# Altium PCB SensorCentral.PcbDoc (part 2 of 3)
Units mm, origin at the board's own origin, x right, y up, seen from the top; angles counter-clockwise.
Board outline 99.21 x 99.07 mm, 6 copper layers (Top Layer 1, GND1, Signal, GND2, GND3, Bottom Layer 1), stack 1.538 mm thick; 91 components, 67 nets, 452 pads, 462 vias.
Unrouted connection lines stored in the file: 278.
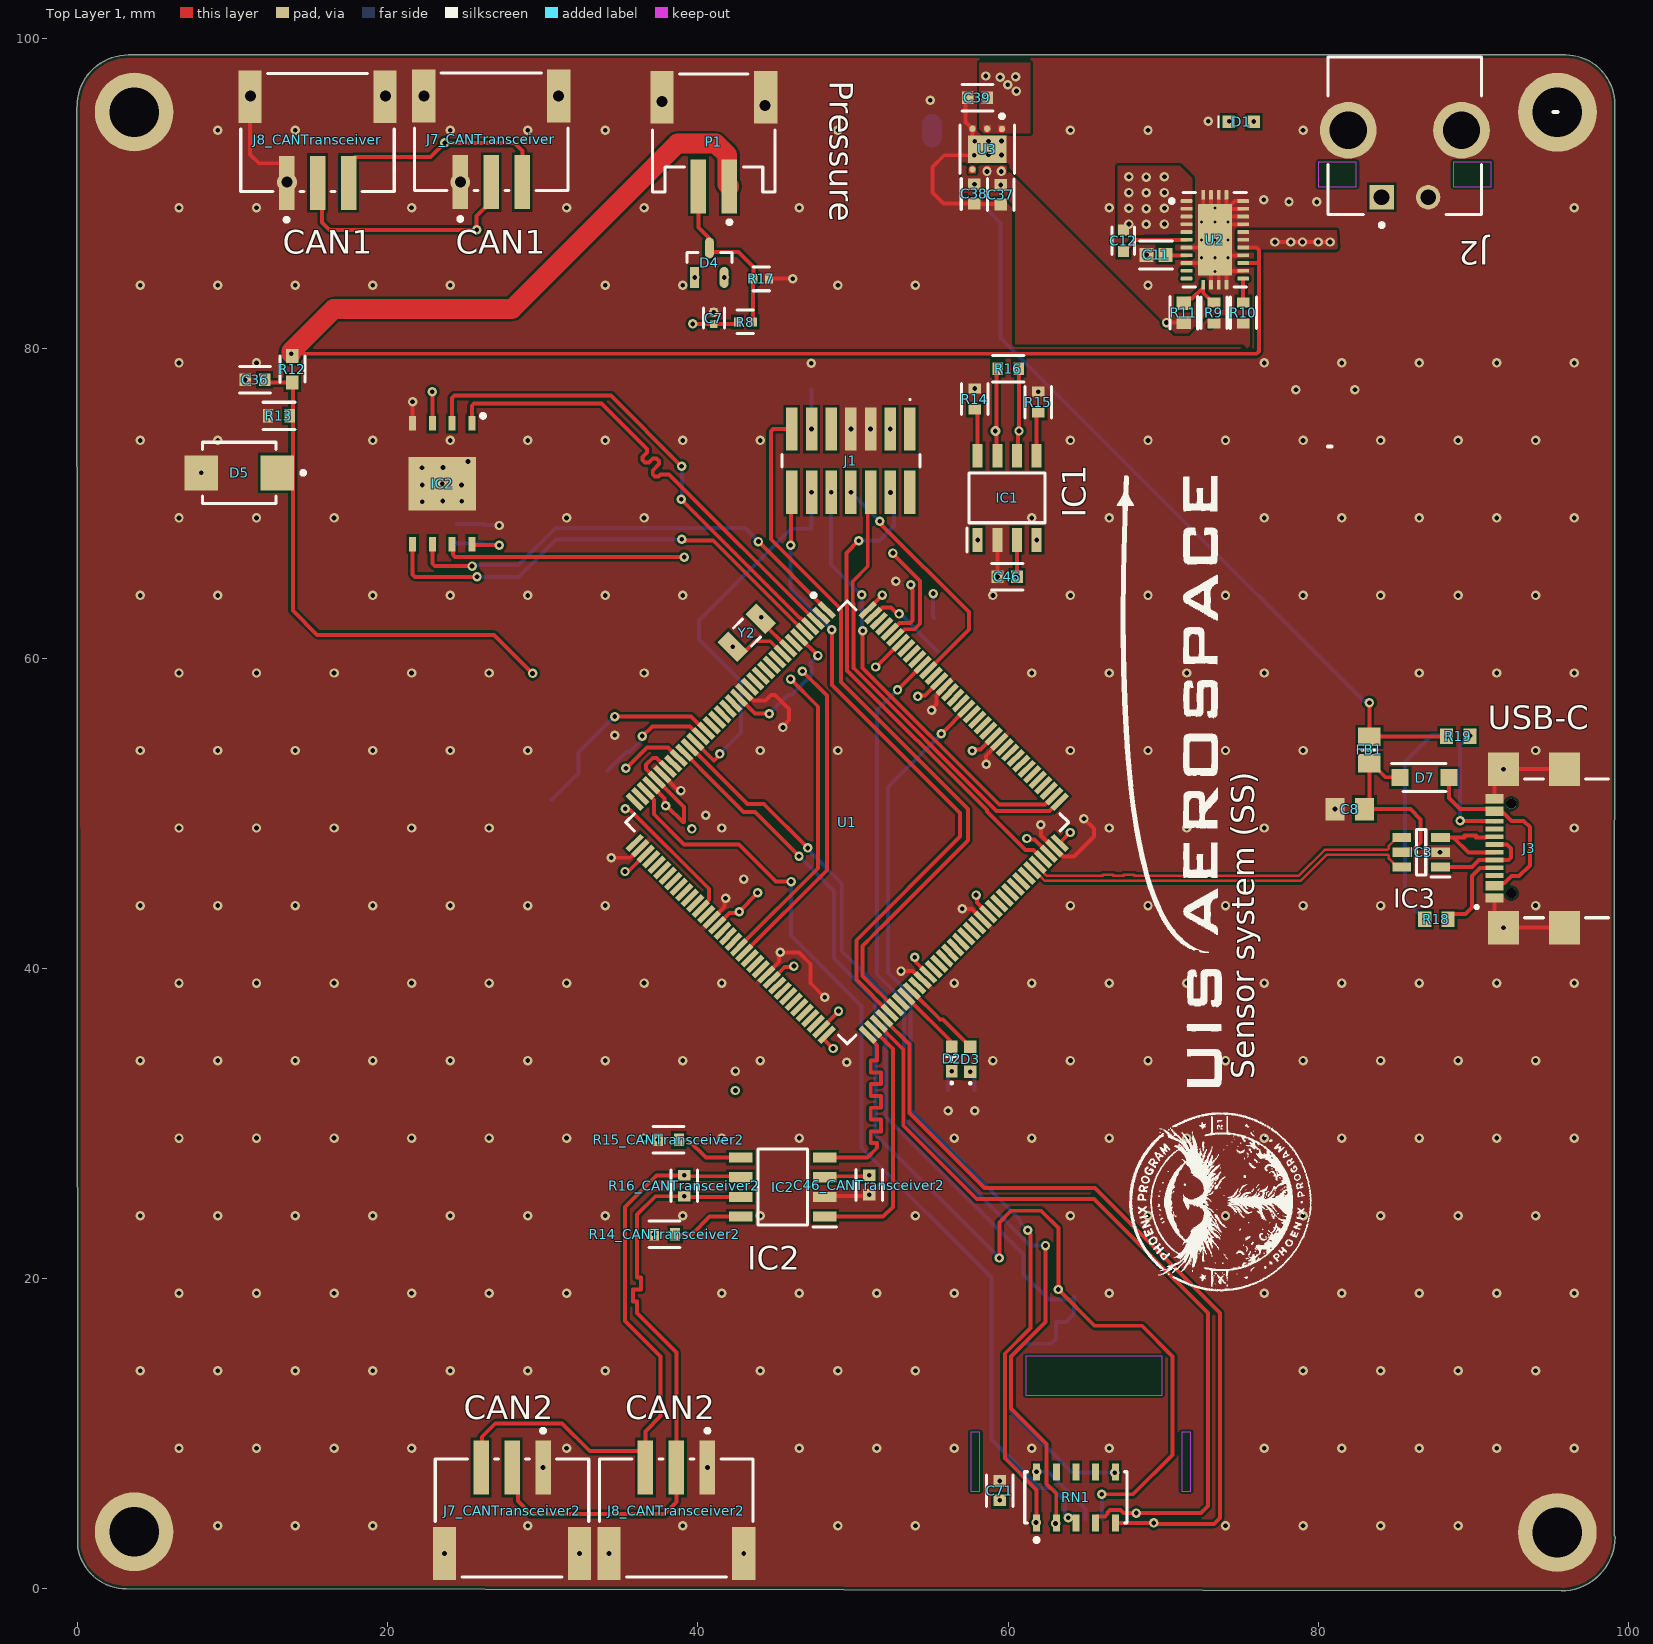
[diagram p0: Top Layer 1 view]

## Part data (continued)
U3: library part CMP-12153-000011-1, "IC REG LINEAR 3.3V 2A 6DFN", Case/Package=DFN, Dropout Voltage=130mV, Max Input Voltage=6V, Max Operating Temperature=125°C, Min Input Voltage=1.25V, Min Operating Temperature=-40°C, Operating Supply Current=1mA, Output Current=2A, Output Voltage=3.3V, Package Quantity=3000, Lead Free="Lead Free", Mount="Surface Mount", Number Of Outputs=1, Number of Regulators=1, Output Type=Fixed, Packaging="Tape and Reel"
Y1: library part CMP-27762-007472-1, "Crystal 50MHz ±10ppm 4pF SMD-4 2.5mm x 2mm", Case/Package=SMD/SMT, ESR (Equivalent Series Resistance)=70R, Frequency=50MHz, Frequency Stability=10ppm, Load Capacitance=4pF, Max Operating Temperature=70°C, Min Operating Temperature=-20°C, Frequency Tolerance=10ppm, Mount="Surface Mount", Packaging="Tape and Reel", RoHS Compliant=Yes
Y2: library part CMP-27762-015953-1, "Crystal 32.768kHz ±20ppm (Tol) 6pF FUND 70kΩ Automotive 2-Pin Mini-CSMD T/R", Case/Package=SMD/SMT, ESR (Equivalent Series Resistance)=70kR, Frequency=32.768kHz, Frequency Tolerance=20ppm, Load Capacitance=6pF, Max Operating Temperature=85°C, Min Operating Temperature=-40°C, Ratings=AEC-Q200, Height=0.035inch, Length=0.126inch, Mount="Surface Mount", Packaging="Cut Tape", RoHS Compliant=Yes, Series=ABS07AIG, Width=0.059inch

## Free pads (board coordinates)
  round 5.08 hole 3.2: 2(3.636,3.679) 2(3.636,95.246) 2(95.428,3.63) 2(95.435,95.238)

## Via types
v1: diameter 0.61, hole 0.305, Top Layer 1 to Bottom Layer 1, tented both sides, 441 vias
v2: diameter 0.5, hole 0.2, Top Layer 1 to Bottom Layer 1, 11 vias
v3: diameter 1.27, hole 0.711, Top Layer 1 to Bottom Layer 1, tented both sides, 8 vias
v4: diameter 0.61, hole 0.33, Top Layer 1 to Bottom Layer 1, tented both sides, 1 vias
v5: diameter 0.65, hole 0.305, Top Layer 1 to Bottom Layer 1, tented both sides, 1 vias